# Altium PCB NRF_Transciever.PcbDoc (part 1 of 2)
Units mm, origin at the board's own origin, x right, y up, seen from the top; angles counter-clockwise.
Board outline 46.03 x 45.87 mm, 4 copper layers (Top Layer, Layer 1, Layer 2, Bottom Layer), stack 1.021 mm thick; 129 components, 92 nets, 321 pads, 297 vias.
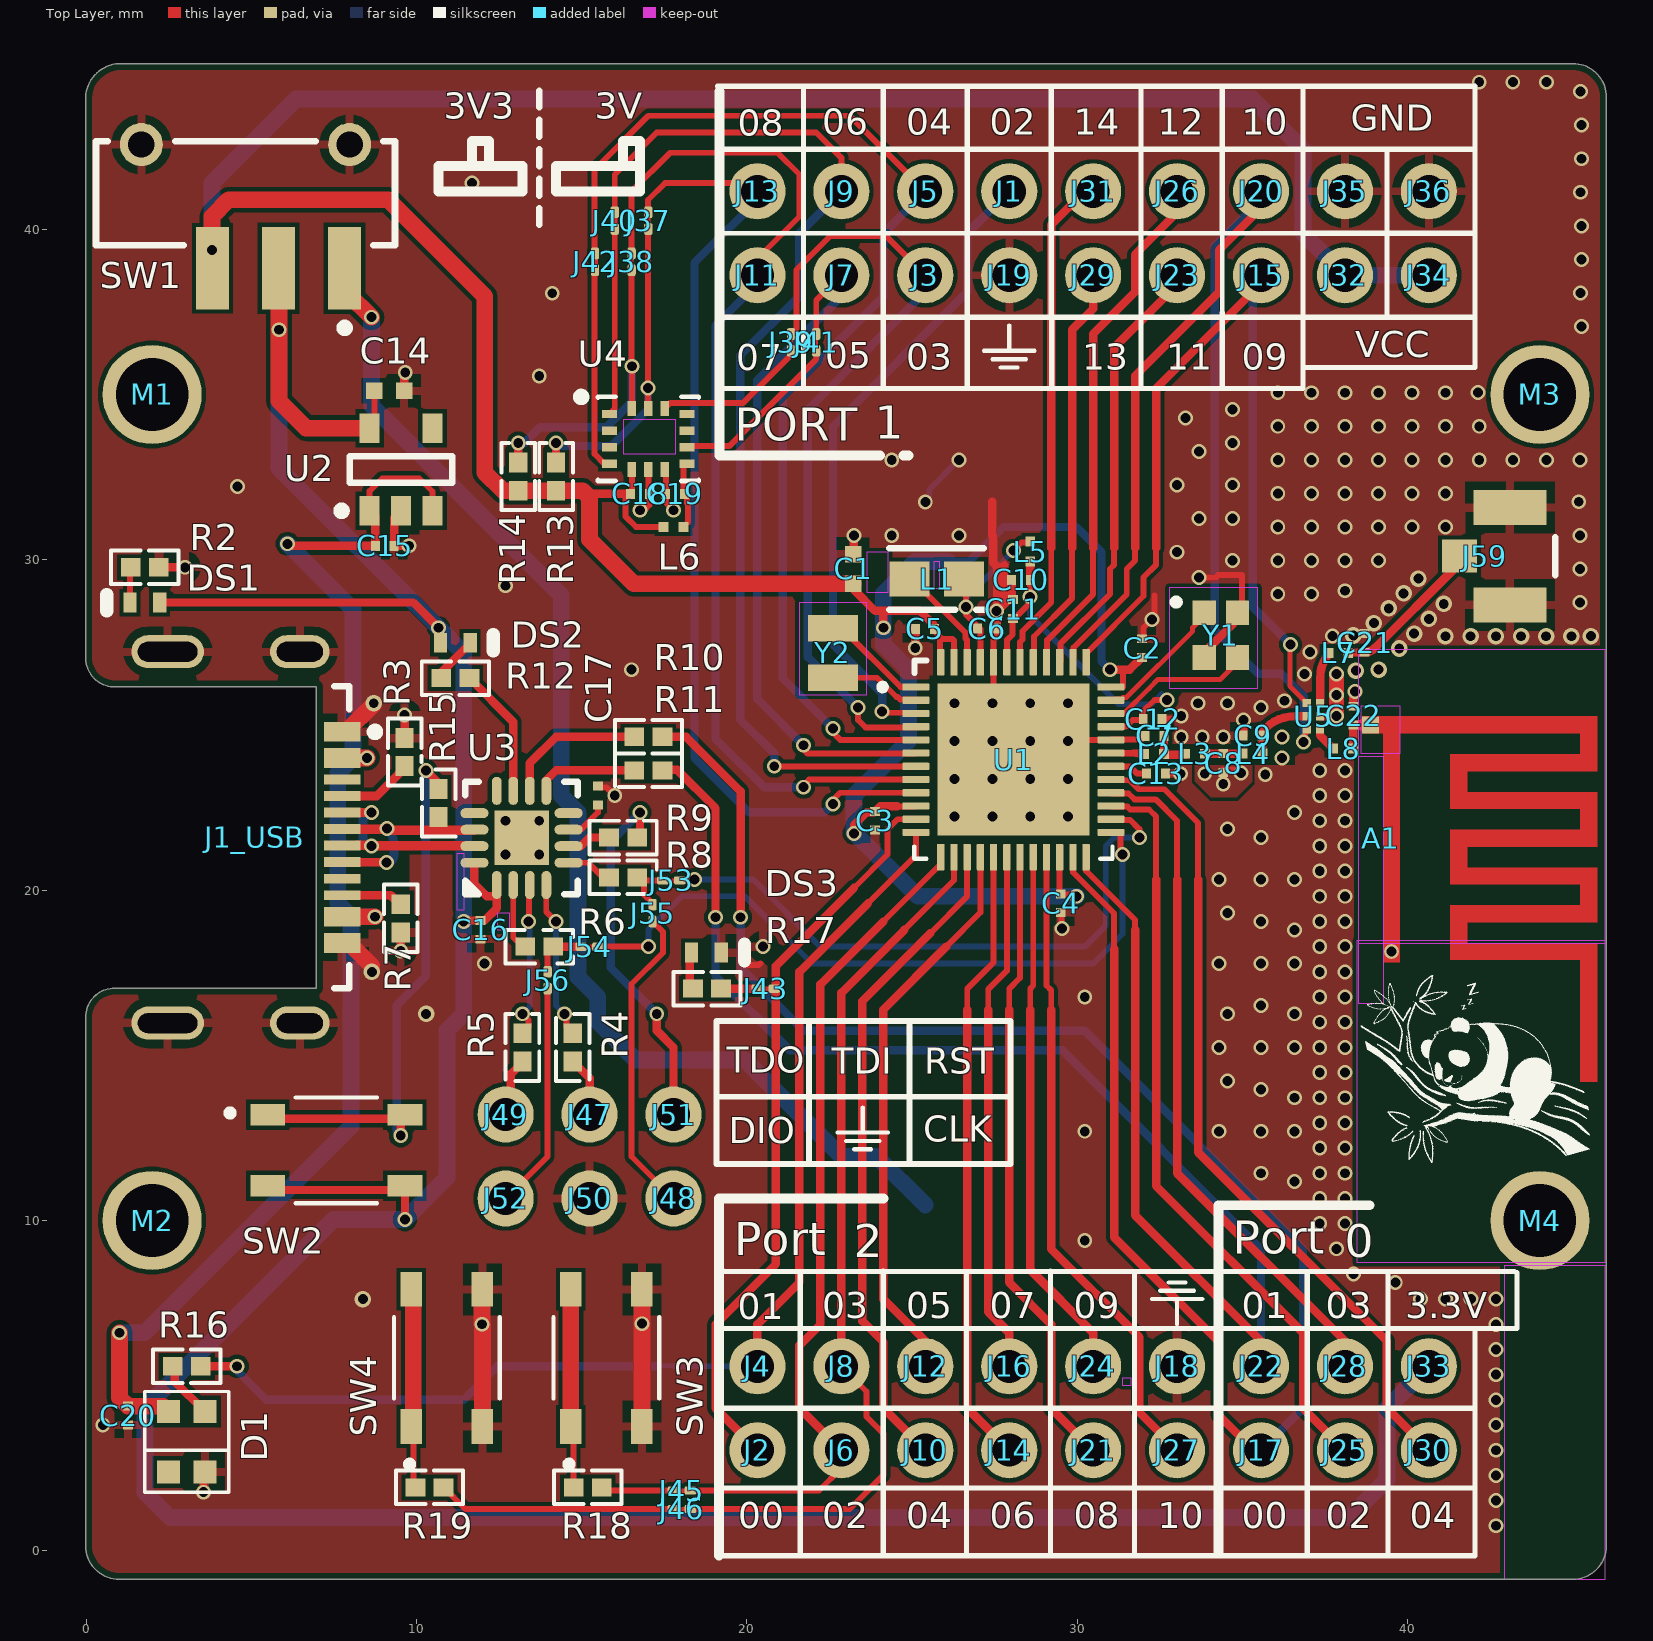
[diagram p0: Top Layer view]
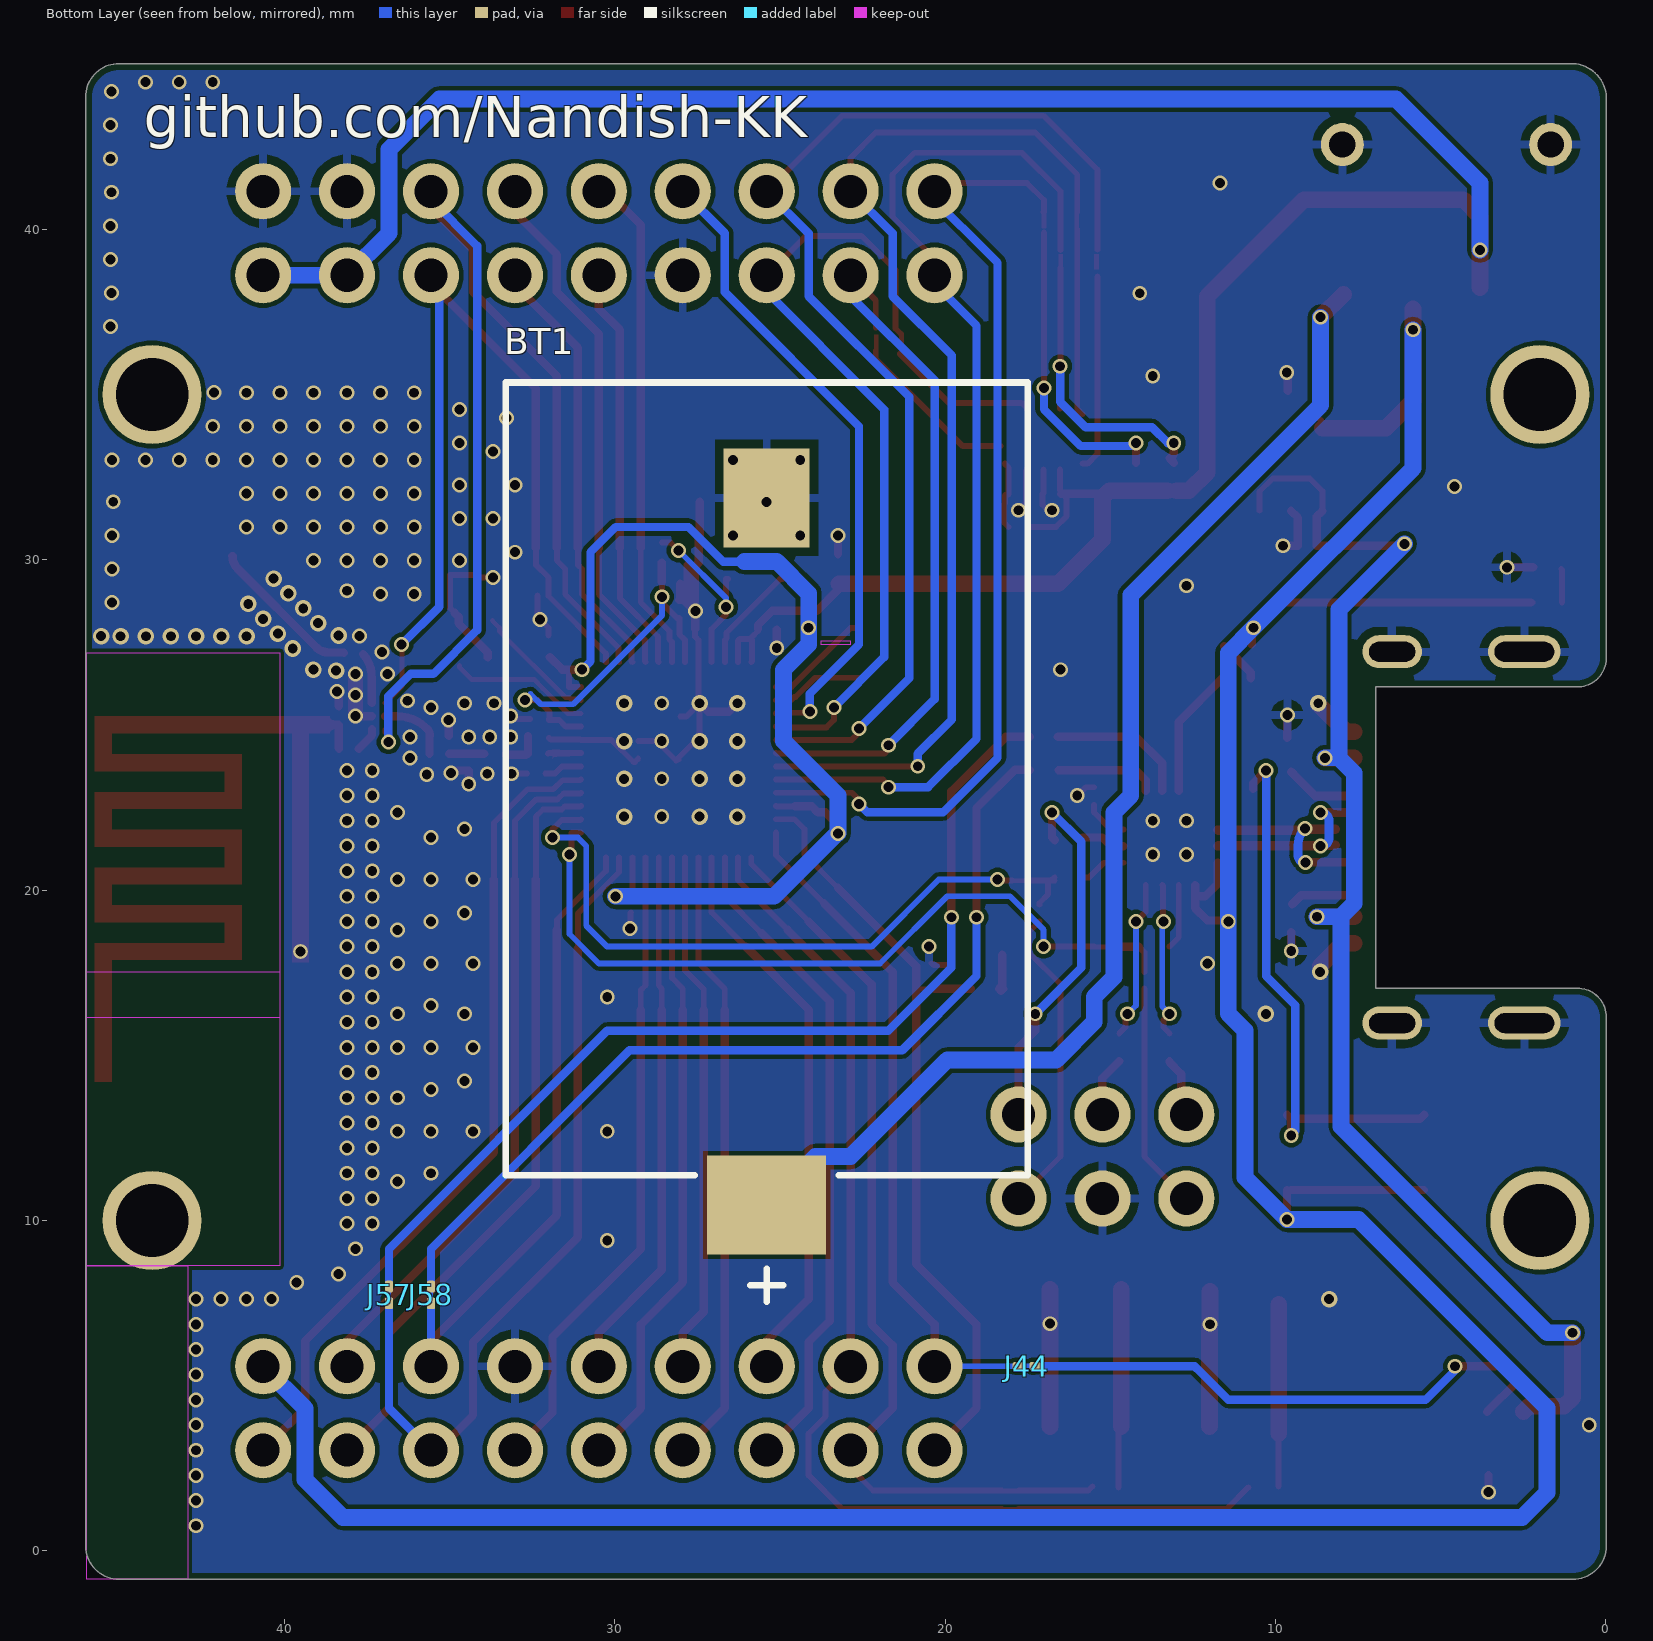
[diagram p1: Bottom Layer view, seen from below]
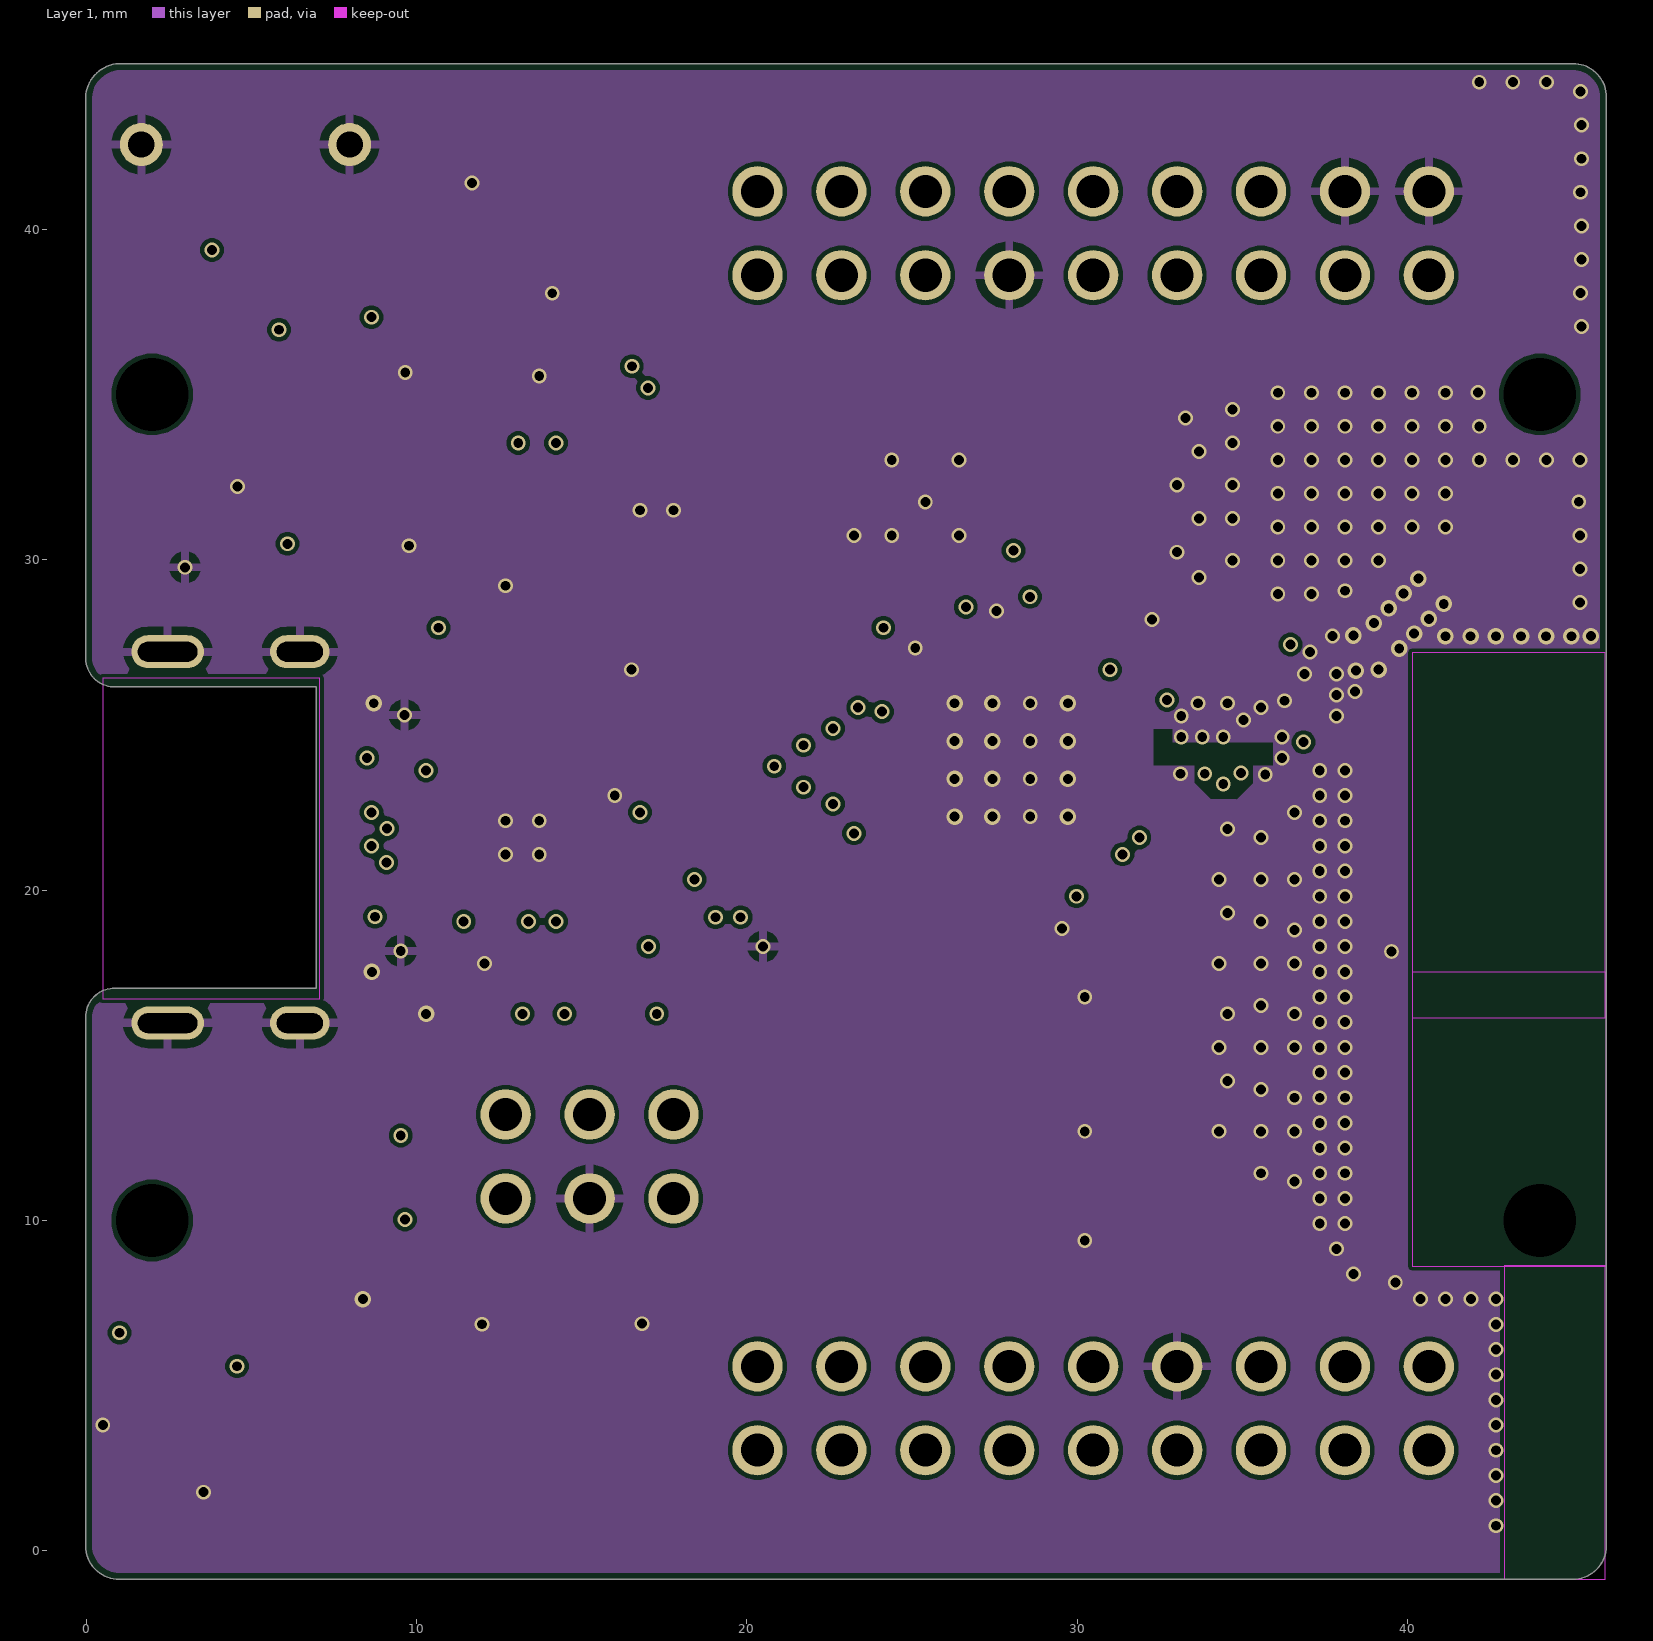
[diagram p2: Layer 1]
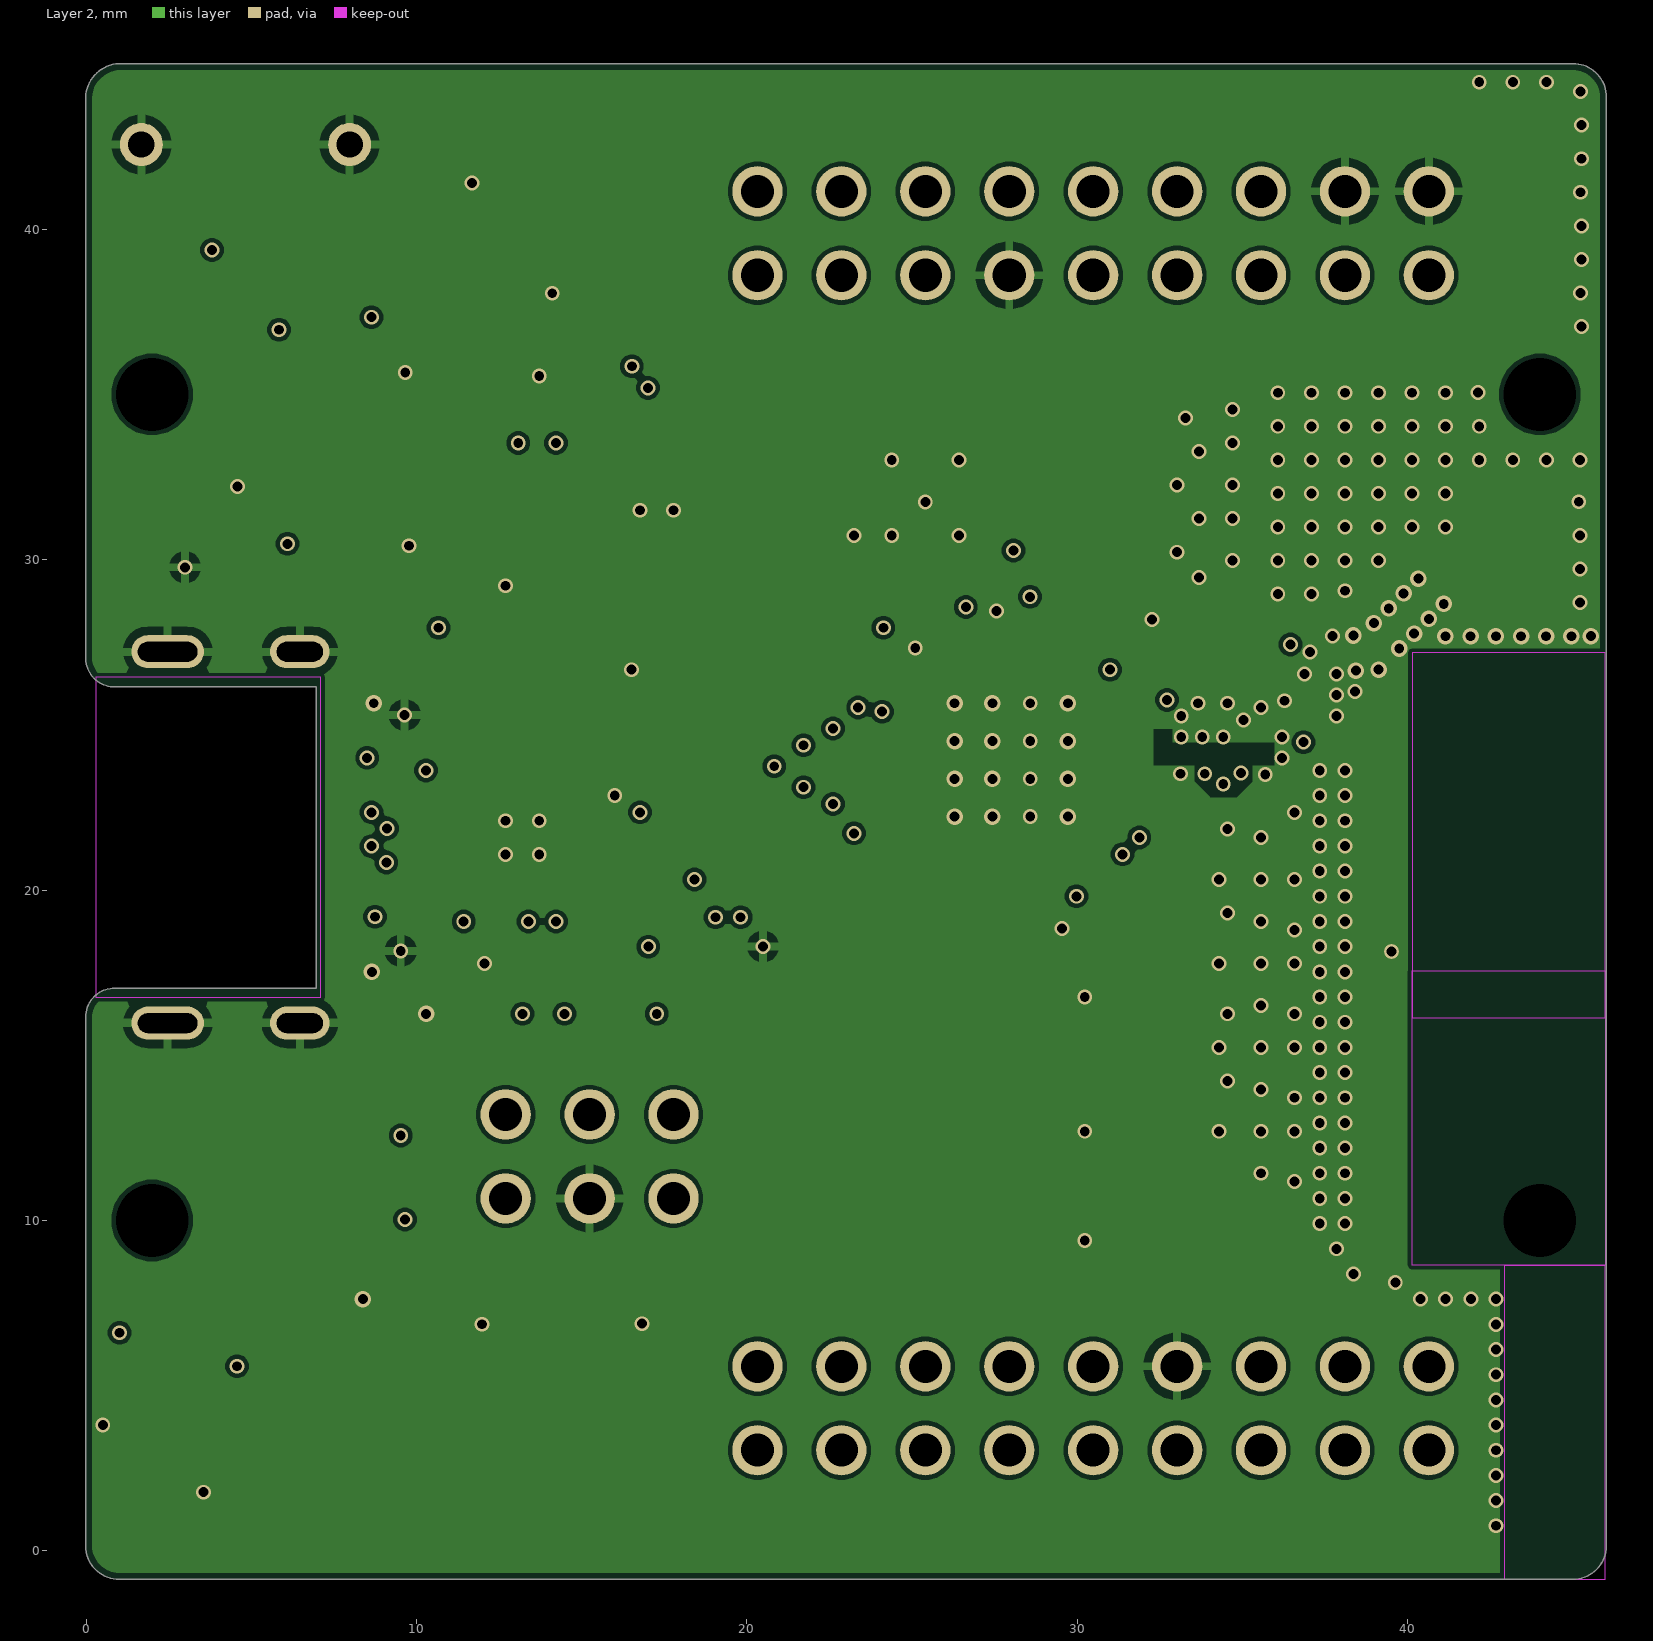
[diagram p3: Layer 2]

## Layer stack, top to bottom
Top Solder: solder mask 0.0102, Solder Resist, Dk 3.5
Top Layer: signal copper 0.0351
Dielectric 2: prepreg 0.2103, PP-022, Dk 4.4
Layer 1: signal copper 0.0152
Dielectric 1: dielectric 0.4999, FR-4, Dk 4.6
Layer 2: signal copper 0.0152
Dielectric 3: prepreg 0.2103, PP-022, Dk 4.4
Bottom Layer: signal copper 0.0351
Bottom Solder: solder mask 0.0102, Solder Resist, Dk 3.5

## Board outline
-0.013,0.141 -0.013,16.151 cw(c0.867,16.151) 0.245,16.773 cw(c0.867,16.151) 0.867,17.031 6.972,17.031 6.972,26.149 0.867,26.149 cw(c0.867,27.029) 0.245,26.407 cw(c0.867,27.029) -0.012,26.996 -0.013,27 -0.013,43.9 cw(c1.05,43.95) 0.999,45.013 1,45.013 45,45.013 cw(c45,44) 46.013,44 46.013,0.156 46.013,0.144 cw(c45,0.156) 45,-0.857 1,-0.857 cw(c1,0.156)

## Design rules (kind name [scope] priority, off if disabled: settings)
BoardOutlineClearance [All] p1: gap=0.2 ignorepadtopadclearanceinfootprint=FALSE
Clearance Clearance_1 [All] p1: gap=0.127 ignorepadtopadclearanceinfootprint=FALSE
Clearance L2_Clearance [InNamedPolygon('GND_L02_P054')] p2: gap=0.254 ignorepadtopadclearanceinfootprint=FALSE
ComponentClearance [All] p1: gap=0.051 collisioncheckmode=3 verticalgap=0.051 showdistances=TRUE checkcomponentboundary=TRUE
DiffPairsRouting USB_Diff_Pair [InDifferentialPair('DAP_USB')] p1: maxlimit=0.203 minlimit=0.203 mostfreqgap=0.203 toplayer_minwidth=0.267 toplayer_maxwidth=0.267 toplayer_prefwidth=0.267 midlayer1_minwidth=0.267 midlayer1_maxwidth=0.267 midlayer1_prefwidth=0.267 midlayer2_minwidth=0.267 midlayer2_maxwidth=0.267 midlayer2_prefwidth=0.267 bottomlayer_minwidth=0.267 bottomlayer_maxwidth=0.267 bottomlayer_prefwidth=0.267 maxuncoupledlength=12.7
Height [All] p1 off: minheight=0 maxheight=25.4 prefheight=12.7
MinimumSolderMaskSliver [All] p1: minsoldermaskwidth=0.1
PolygonConnect [All] p1: connectstyle=Relief reliefconductorwidth=0.254 reliefentries=4 polygonreliefangle="90 Angle" airgapwidth=0.254
RoutingVias RoutingVias_1 [All] p1: holewidth=0.3 width=0.45 viastyle="Through Hole" minholewidth=0.3 minwidth=0.45 maxholewidth=0.8 maxwidth=1.27
SilkToSilkClearance [All] p1: silktosilkclearance=0.1
SilkToSolderMaskClearance [IsPad] p1: minsilkscreentomaskgap=0.15 clearancetoexposedcopper=TRUE
SolderMaskExpansion [All] p1: expansion=0 istentingtop=FALSE soldermaskfromhole=TRUE
SupplyNets "Schematic Supply Nets_3" [InNet('VCC_nRF')] p1: voltage=0.000
SupplyNets "Schematic Supply Nets_2" [InNet('VDD_3V3')] p2: voltage=0.000
SupplyNets "Schematic Supply Nets_1" [InNet('3V')] p3: voltage=0.000
SupplyNets "Schematic Supply Nets" [InNet('GND')] p4: voltage=0.000
Width [All] p1: maxlimit=0.508 minlimit=0.152 preferedwidth=0.254
24 further rules are at their usual default settings.

## Classes and differential pairs
differential pair DAP_USB: +DAP_USB_P -DAP_USB_N

## Components (designator, comment, footprint, x,y, rotation, side; value= is the part's Value field where it differs from the comment)
A1 "2.4GHz MIFA Antenna" "2.4GHZ MIFA" 38.619,25.254 r270 top
BT1 "S8421-45R" FP-S8421-45R-MFG 25.4,23.368 r180 bottom locked
C1 "10uF" 0402_SMD_CAPACITOR 23.216,29.718 r270 top
C2 "100nF" "0201 SMD CAPACITOR" 31.963,27.322 r270 top
C3 "100nF" "0201 SMD CAPACITOR" 23.876,22.098 r90 top
C4 "100nF" "0201 SMD CAPACITOR" 29.499,19.601 r90 top
C5 "100nF" "0201 SMD CAPACITOR" 25.388,27.905 r0 top
C6 "2.2uF" "0201 SMD CAPACITOR" 27.265,27.915 r180 top
C7 "1.5pF" "0201 SMD CAPACITOR" 32.34,24.663 r0 top
C8 "2.0pF" "0201 SMD CAPACITOR" 34.417,23.845 r90 top
C9 "0.3pF" "0201 SMD CAPACITOR" 35.306,24.673 r0 top
C10 "2.2uF" "0201 SMD CAPACITOR" 28.29,29.388 r0 top
C11 "10nF" "0201 SMD CAPACITOR" 28.049,28.506 r270 top
C12 "2.2nF" "0201 SMD CAPACITOR" 32.282,25.176 r180 top
C13 "3.9pF" "0201 SMD CAPACITOR" 32.379,23.523 r180 top
C14 "1uF" 0402_SMD_CAPACITOR 9.178,35.11 r180 top
C15 "100nF" "0201 SMD CAPACITOR" 9.04,30.415 r180 top
C16 "100nF" "0201 SMD CAPACITOR" 11.938,18.796 r90 top
C17 "3.9pF" "0201 SMD CAPACITOR" 15.494,22.86 r270 top
C18 "100nF" "0201 SMD CAPACITOR" 16.764,31.989 r180 top
C19 "100nF" "0201 SMD CAPACITOR" 17.822,31.989 r0 top
C20 "100nF" "0201 SMD CAPACITOR" 1.27,4.095 r90 top
C21 "DNP" "0201 SMD Capacitor" 38.696,27.482 r270 top
C22 "DNP" "0201 SMD Capacitor" 38.354,25.279 r270 top
D1 "WS2812B-2020" WS2812B-2020 3.048,3.302 r270 top
DS1 "16-219A/T2D-AR2T1QY/3T" EVRL-0402-2_V 1.778,28.7 r180 top
DS2 "16-219A/T2D-AR2T1QY/3T" EVRL-0402-2_V 11.176,27.485 r0 top
DS3 "16-219A/T2D-AR2T1QY/3T" EVRL-0402-2_V 18.777,18.11 r0 top
J1 "Single_Header_2.54mm" SINGLE_HEADER_2.54MM 30.48,42.418 r90 top
J1_USB "216990-0002" FP-216990-0002-MFG 3.62,21.594 r270 top
J2 "Single_Header_2.54mm" SINGLE_HEADER_2.54MM 21.59,0.508 r0 top
J3 "Single_Header_2.54mm" SINGLE_HEADER_2.54MM 27.94,39.878 r90 top
J4 "Single_Header_2.54mm" SINGLE_HEADER_2.54MM 21.59,3.048 r0 top
J5 "Single_Header_2.54mm" SINGLE_HEADER_2.54MM 27.94,42.418 r90 top
J6 "Single_Header_2.54mm" SINGLE_HEADER_2.54MM 24.13,0.508 r0 top
J7 "Single_Header_2.54mm" SINGLE_HEADER_2.54MM 25.4,39.878 r90 top
J8 "Single_Header_2.54mm" SINGLE_HEADER_2.54MM 24.13,3.048 r0 top
J9 "Single_Header_2.54mm" SINGLE_HEADER_2.54MM 25.4,42.418 r90 top
J10 "Single_Header_2.54mm" SINGLE_HEADER_2.54MM 26.67,0.508 r0 top
J11 "Single_Header_2.54mm" SINGLE_HEADER_2.54MM 22.86,39.878 r90 top
J12 "Single_Header_2.54mm" SINGLE_HEADER_2.54MM 26.67,3.048 r0 top
J13 "Single_Header_2.54mm" SINGLE_HEADER_2.54MM 21.59,38.608 r0 top
J14 "Single_Header_2.54mm" SINGLE_HEADER_2.54MM 29.21,0.508 r0 top
J15 "Single_Header_2.54mm" SINGLE_HEADER_2.54MM 38.1,39.878 r90 top
J16 "Single_Header_2.54mm" SINGLE_HEADER_2.54MM 29.21,3.048 r0 top
J17 "Single_Header_2.54mm" SINGLE_HEADER_2.54MM 38.1,4.318 r90 top
J18 "Single_Header_2.54mm" SINGLE_HEADER_2.54MM 35.56,6.858 r90 top
J19 "Single_Header_2.54mm" SINGLE_HEADER_2.54MM 29.21,36.068 r0 top
J20 "Single_Header_2.54mm" SINGLE_HEADER_2.54MM 34.29,43.688 r180 top
J21 "Single_Header_2.54mm" SINGLE_HEADER_2.54MM 33.02,4.318 r90 top
J22 "Single_Header_2.54mm" SINGLE_HEADER_2.54MM 36.83,3.048 r0 top
J23 "Single_Header_2.54mm" SINGLE_HEADER_2.54MM 31.75,41.148 r180 top
J24 "Single_Header_2.54mm" SINGLE_HEADER_2.54MM 31.75,3.048 r0 top
J25 "Single_Header_2.54mm" SINGLE_HEADER_2.54MM 40.64,4.318 r90 top
J26 "Single_Header_2.54mm" SINGLE_HEADER_2.54MM 31.75,43.688 r180 top
J27 "Single_Header_2.54mm" SINGLE_HEADER_2.54MM 34.29,0.508 r0 top
J28 "Single_Header_2.54mm" SINGLE_HEADER_2.54MM 40.64,6.858 r90 top
J29 "Single_Header_2.54mm" SINGLE_HEADER_2.54MM 29.21,41.148 r180 top
J30 "Single_Header_2.54mm" SINGLE_HEADER_2.54MM 43.18,4.318 r90 top
J31 "Single_Header_2.54mm" SINGLE_HEADER_2.54MM 31.75,38.608 r0 top
J32 "Single_Header_2.54mm" SINGLE_HEADER_2.54MM 40.64,39.878 r90 top
J33 "Single_Header_2.54mm" SINGLE_HEADER_2.54MM 43.18,6.858 r90 top
J34 "Single_Header_2.54mm" SINGLE_HEADER_2.54MM 43.18,39.878 r90 top
J35 "Single_Header_2.54mm" SINGLE_HEADER_2.54MM 40.64,42.418 r90 top
J36 "Single_Header_2.54mm" SINGLE_HEADER_2.54MM 43.18,42.418 r90 top
J37 "Shorted_Solder_Bridge" SHORTED_SOLDER_BRIDGE 17.018,40.259 r90 top
J38 "Shorted_Solder_Bridge" SHORTED_SOLDER_BRIDGE 16.51,39.014 r90 top
J39 "Shorted_Solder_Bridge" SHORTED_SOLDER_BRIDGE 21.336,36.576 r90 top
J40 "Shorted_Solder_Bridge" SHORTED_SOLDER_BRIDGE 16.002,40.259 r270 top
J41 "Shorted_Solder_Bridge" SHORTED_SOLDER_BRIDGE 22.098,36.576 r90 top
J42 "Shorted_Solder_Bridge" SHORTED_SOLDER_BRIDGE 15.405,39.014 r270 top
J43 "Shorted_Solder_Bridge" SHORTED_SOLDER_BRIDGE 20.574,17.018 r180 top
J44 "Shorted_Solder_Bridge" SHORTED_SOLDER_BRIDGE 17.526,5.588 r180 bottom
J45 "Shorted_Solder_Bridge" SHORTED_SOLDER_BRIDGE 18.034,1.829 r180 top
J46 "Shorted_Solder_Bridge" SHORTED_SOLDER_BRIDGE 18.034,1.27 r180 top
J47 "Single_Header_2.54mm" SINGLE_HEADER_2.54MM 17.78,14.478 r90 top
J48 "Single_Header_2.54mm" SINGLE_HEADER_2.54MM 20.32,11.938 r90 top
J49 "Single_Header_2.54mm" SINGLE_HEADER_2.54MM 15.24,14.478 r90 top
J50 "Single_Header_2.54mm" SINGLE_HEADER_2.54MM 17.78,11.938 r90 top
J51 "Single_Header_2.54mm" SINGLE_HEADER_2.54MM 19.05,10.668 r0 top
J52 "Single_Header_2.54mm" SINGLE_HEADER_2.54MM 15.24,11.938 r90 top
J53 "Shorted_Solder_Bridge" SHORTED_SOLDER_BRIDGE 17.715,20.292 r180 top
J54 "Shorted_Solder_Bridge" SHORTED_SOLDER_BRIDGE 15.24,18.288 r180 top
J55 "Open_Solder_Bridge" OPEN_SOLDER_BRIDGE 17.145,19.304 r90 top
J56 "Open_Solder_Bridge" OPEN_SOLDER_BRIDGE 13.97,17.272 r90 top
J57 "Shorted_Solder_Bridge" SHORTED_SOLDER_BRIDGE 36.83,7.747 r90 bottom
J58 "Shorted_Solder_Bridge" SHORTED_SOLDER_BRIDGE 35.56,7.747 r90 bottom
J59 "U.FL-R-SMT(10)" FP-U_FL-R-SMT_10-MFG 43.093,30.106 r90 top
L1 "4.7uH" FP-MLZ1608-IPC_A 25.745,29.413 r180 top
L2 "2.7nH" 0201_SMD_INDUCTOR 32.325,24.12 r0 top
L3 "3.5nH" 0201_SMD_INDUCTOR 33.561,24.127 r0 top
L4 "3.5nH" 0201_SMD_INDUCTOR 35.306,24.13 r0 top
L5 "FB1" 0201_SMD_INDUCTOR 28.575,30.244 r90 top
L6 "FB1" 0201_SMD_INDUCTOR 17.78,30.988 r180 top
L7 "DNP" 0201_SMD_INDUCTOR 37.897,27.178 r0 top
L8 "DNP" 0201_SMD_INDUCTOR 38.044,24.282 r0 top
M1 "M2_Mounting_Hole" "M2 MOUNTING HOLE" 2,35 r0 top
M2 "M2_Mounting_Hole" "M2 MOUNTING HOLE" 2,10 r0 top
M3 "M2_Mounting_Hole" "M2 MOUNTING HOLE" 44,35 r0 top
M4 "M2_Mounting_Hole" "M2 MOUNTING HOLE" 44,10 r0 top
R2 "1k" RES_0402_GENERIC 1.778,29.769 r180 top
R3 "5.1k" RES_0402_GENERIC 9.643,24.179 r270 top
R4 "100R" RES_0402_GENERIC 14.732,15.24 r270 top
R5 "100R" RES_0402_GENERIC 13.208,15.24 r270 top
R6 "100R" RES_0402_GENERIC 13.716,18.288 r0 top
R7 "5.1k" RES_0402_GENERIC 9.525,19.146 r90 top
R8 "100R" RES_0402_GENERIC 16.256,20.385 r0 top
R9 "100R" RES_0402_GENERIC 16.256,21.59 r0 top
R10 "100R" RES_0402_GENERIC 17.018,24.638 r0 top
R11 "100R" RES_0402_GENERIC 17.018,23.622 r180 top
R12 "1k" RES_0402_GENERIC 11.176,26.416 r180 top
R13 "100k" RES_0402_GENERIC 14.224,32.512 r270 top
R14 "100k" RES_0402_GENERIC 13.081,32.512 r270 top
R15 "10k" RES_0402_GENERIC 10.672,22.636 r90 top
R16 "100R" RES_0402_GENERIC 3.048,5.588 r180 top
R17 "1k" RES_0402_GENERIC 18.796,17.018 r0 top
R18 "10k" RES_0402_GENERIC 15.183,1.923 r0 top
R19 "10k" RES_0402_GENERIC 10.397,1.923 r0 top
SW1 "CSS-1210TB" FP-CSS-1210TB-MFG 4.826,42.164 r180 top
SW2 "SKRPABE010" SW_SKRPABE010 7.577,12.124 r0 top
SW3 "SKRPABE010" SW_SKRPABE010 15.748,5.842 r90 top
SW4 "SKRPABE010" SW_SKRPABE010 10.922,5.842 r90 top
U1 "NRF54L15-QFAA-R Split Symbol" NRF54L15_LQFN_48 27.813,23.945 r0 top
U2 "TCR2EF33" TCR2EF33-SOT-23-5 9.533,32.728 r90 top
U3 "CH552P-QFN16" CH552-QFN16_3X3 13.18,21.578 r90 top
U4 "BMI270_IMU" BMI_270_PQFN50P300X250X70-14L 17.018,33.655 r0 top locked
U5 "BGS12P2L6E6327XTSA1" FP-PG-TSLP-6-MFG 37.146,25.263 r180 top
Y1 "32MHz" OSC_XRCGB32M000F2P01R0 34.343,27.715 r0 top
Y2 "CM8V-T1A-32.768KHZ-9PF-20PPM-TA-QC" XTAL_CM8V-T1A-32.768KHZ-9PF-20PPM-TA-QC 22.606,27.178 r90 top

## Footprints (in the part's own frame and the unit in brackets; to place one, negate y for a bottom-side part, rotate by r counter-clockwise, add the part's x,y. Pads: shape width x height; smd on the part's side, far side on the other; paste and mask are expansions set on the pad)
"2.4GHZ MIFA" [mil] "2.4GHz Meandered Inverted-F Antenna (MIFA) Design from the Cypress appnote AN91445."
  rect 20x20 smd mask+4: 1(10,10)
  round 17.72 hole 11.81: 2(280,35)
  Top Layer region: 293,25 20,25 20,45 293,45
  Top Layer region: 180,105 180,280 200,280 200,105
  Top Layer region: 435,260 285,260 285,280 435,280
  Top Layer region: 135,105 135,280 155,280 155,105
  Top Layer region: 90,105 90,280 110,280 110,105
  Top Layer region: 45,105 45,280 65,280 65,105
  Top Layer region: 0,0 0,280 20,280 20,0
  Top Layer region: 65,260 0,260 0,280 65,280
  Top Layer region: 110,105 45,105 45,125 110,125
  Top Layer region: 225,105 225,280 245,280 245,105
  Top Layer region: 270,105 270,280 290,280 290,105
  Top Layer region: 155,260 90,260 90,280 155,280
  Top Layer region: 200,105 135,105 135,125 200,125
  Top Layer region: 245,260 180,260 180,280 245,280
  Top Layer region: 290,105 225,105 225,125 290,125
"0201 SMD CAPACITOR" [mm] "GMK063BJ104KP"
  rect 0.27x0.3 smd mask+0.05: 1(-0.285,0) 2(0.285,0)
  body extent -0.32,-0.17 0.32,0.17, height 0.3
"0201 SMD Capacitor" [mm] "GMK063BJ104KP"
  rect 0.27x0.3 smd mask+0.05: 1(-0.285,0) 2(0.285,0)
  body extent -0.32,-0.17 0.32,0.17, height 0.3
0201_SMD_INDUCTOR [mm]
  rect 0.3x0.3 smd: 1(-0.3,0) 2(0.3,0)
  body extent -0.3,-0.15 0.3,0.15, height 0.3
0402_SMD_CAPACITOR [mm]
  rect 0.5x0.5 smd: 1(-0.45,0) 2(0.45,0)
  body extent -0.41,-0.23 0.38,0.23, height 0.25
BMI_270_PQFN50P300X250X70-14L [mm] "PQFN, 14-Leads, Body 3.00x2.50mm, Pitch 0.50mm, IPC High Density"
  rect 0.45x0.25 smd: 1(-1.175,0.75) 2(-1.175,0.25) 3(-1.175,-0.25) 4(-1.175,-0.75) 8(1.175,-0.75) 9(1.175,-0.25) 10(1.175,0.25) 11(1.175,0.75)
  rect 0.25x0.45 smd: 5(-0.5,-0.925) 6(0,-0.925) 7(0.5,-0.925) 12(0.5,0.925) 13(0,0.925) 14(-0.5,0.925)
  silkscreen extent -2.16,-1.28 1.53,1.39, body extent -1.53,-1.28 1.53,1.28, height 0.7
CH552-QFN16_3X3 [mm] "QFN, 16-Leads, Body 3.00x3.00mm, Pitch 0.50mm, Thermal Pad 1.65x1.65mm, IPC Medium Density"
  oval 0.85x0.3 smd: 1(-1.425,0.75) 2(-1.425,0.25) 3(-1.425,-0.25) 4(-1.425,-0.75) 9(1.425,-0.75) 10(1.425,-0.25) 11(1.425,0.25) 12(1.425,0.75)
  oval 0.3x0.85 smd: 5(-0.75,-1.425) 6(-0.25,-1.425) 7(0.25,-1.425) 8(0.75,-1.425) 13(0.75,1.425) 14(0.25,1.425) 15(-0.25,1.425) 16(-0.75,1.425)
  rect 1.65x1.65 smd: 17(0,0)
  silkscreen extent -1.7,-1.7 1.7,1.7, body extent -1.58,-1.58 1.58,1.58, height 0.8
EVRL-0402-2_V [mm] "SMD, 2-Leads, Body 1x0.5mm"
  rect 0.4x0.6 smd: 1(-0.45,0) 2(0.45,0)
  silkscreen extent 1.15,-0.25 1.15,0.25, body extent -0.5,-0.25 0.5,0.25, height 0.25
FP-216990-0002-MFG [mm]
  rrect100% 1x1.8 hole 1.4 slot 0.6 at 0 deg paste-2539.97 mask+0: 1(-5.62,2.85) 2(5.62,2.85)
  rrect100% 1x2.2 hole 1.8 slot 0.6 at 0 deg paste-2539.97 mask+0: 3(-5.62,-1.15) 4(5.62,-1.15)
  rect 0.6x1.1 smd paste+0 mask+0: A1-B12(-3.2,4.13) A4-B9(-2.4,4.13) B1-A12(3.2,4.13) B4-A9(2.4,4.13)
  rect 0.3x1.1 smd paste+0 mask+0: A5(-1.25,4.13) A6(-0.25,4.13) A7(0.25,4.13) A8(1.25,4.13) B5(1.75,4.13) B6(0.75,4.13) B7(-0.75,4.13) B8(-1.75,4.13)
  silkscreen extent -4.57,3.9 4.57,5.25, body extent -6.22,-3.45 6.22,4.65, height 0.25
FP-CSS-1210TB-MFG [mm]
  rect 1x2.5 smd paste+0 mask+0: 1(-3,3.35) 2(-1,3.35) 3(1,3.35)
  round 1.3 hole 0.8 paste-2539.97 mask+0: 4(-3.15,-0.4) 5(3.15,-0.4)
  silkscreen extent -4.52,-0.5 4.52,5.27, body extent -4.62,-2.75 4.62,4.7, height 0.25
FP-MLZ1608-IPC_A [mm]
  rect 1.206x1.058 smd paste+0 mask+0: 1(-0.826,0) 2(0.826,0)
  silkscreen extent -1.43,-0.93 1.43,0.93, body extent -1.93,-1.03 1.93,1.03, height 0.25
FP-PG-TSLP-6-MFG [mm]
  rect 0.25x0.25 smd paste-1000 mask+0: 1(-0.2,0.4) 2(-0.2,0) 3(-0.2,-0.4) 4(0.2,-0.4) 5(0.2,0) 6(0.2,0.4)
  body extent -0.48,-0.67 0.48,0.67, height 0.25
FP-S8421-45R-MFG [mm]
  rect 2.6x3 smd paste+0 mask+0: 1(0,8.5)
  rect 3.6x3 smd paste+0 mask+0: 2(0,-12.9)
  silkscreen extent -7.9,-15.83 7.9,12, body extent -7.8,-14 7.8,11.28, height 5.5
FP-U_FL-R-SMT_10-MFG [mm]
  rect 1x1.05 smd paste-1000 mask+0: 1(0,1.525)
  rect 1.05x2.2 smd paste-1000 mask+0: 2(-1.475,0) 3(1.475,0)
  silkscreen extent -0.58,-1.38 0.58,-1.38, body extent -2.1,-1.48 2.1,2.15, height 0.25
"M2 MOUNTING HOLE" [mm] "M2 Mounting hole ( 2.2 dia)"
  round 3 / inner round 0 / far side round 3 hole 2.2 mask-2539.97: ""(0,0)
NRF54L15_LQFN_48 [mm]
  rrect25% 0.81x0.22 smd: 1(-2.696,2.2) 2(-2.696,1.8) 3(-2.696,1.4) 4(-2.696,1) 5(-2.696,0.6) 6(-2.696,0.2) 7(-2.696,-0.2) 8(-2.696,-0.6) 9(-2.696,-1) 10(-2.696,-1.4) 11(-2.696,-1.8) 12(-2.696,-2.2) 25(3.204,-2.2) 26(3.204,-1.8) 27(3.204,-1.4) 28(3.204,-1) 29(3.204,-0.6) 30(3.204,-0.2) 31(3.204,0.2) 32(3.204,0.6) 33(3.204,1) 34(3.204,1.4) 35(3.204,1.8) 36(3.204,2.2)
  rrect25% 0.22x0.81 smd: 13(-1.946,-2.95) 14(-1.546,-2.95) 15(-1.146,-2.95) 16(-0.746,-2.95) 17(-0.346,-2.95) 18(0.054,-2.95) 19(0.454,-2.95) 20(0.854,-2.95) 21(1.254,-2.95) 22(1.654,-2.95) 23(2.054,-2.95) 24(2.454,-2.95) 37(2.454,2.95) 38(2.054,2.95) 39(1.654,2.95) 40(1.254,2.95) 41(0.854,2.95) 42(0.454,2.95) 43(0.054,2.95) 44(-0.346,2.95) 45(-0.746,2.95) 46(-1.146,2.95) 47(-1.546,2.95) 48(-1.946,2.95)
  rect 4.6x4.6 smd paste-3: 49(0.254,0)
  silkscreen extent -3.81,-3 3.25,3, body extent -2.75,-3 3.25,3, height 0.85
OPEN_SOLDER_BRIDGE [mil] "Solder Bridge"
  rrect50% 14x10 smd mask+2: 1(-10,0) 2(10,0)
OSC_XRCGB32M000F2P01R0 [mm]
  rect 0.7x0.75 smd: 1(-0.5,0.675) 2(-0.5,-0.675) 3(0.5,-0.675) 4(0.5,0.675)
  silkscreen extent -1.45,0.9 -1.25,1.1, body extent -0.8,-1 0.8,1, height 0.7
RES_0402_GENERIC [mm]
  rect 0.6x0.55 smd: 1(-0.425,0) 2(0.425,0)
  silkscreen extent -1.02,-0.51 1.02,0.51, body extent -0.53,-0.28 0.53,0.28, height 0.3
SHORTED_SOLDER_BRIDGE [mil] "Solder Bridge"
  rrect50% 14x10 smd mask+2: 1(-10,0) 2(10,0)
  Top Layer region: -9,3.02 9,3.02 9,-2.01 -9,-2.01 -9,0
SINGLE_HEADER_2.54MM [mm]
  round 1.7 / inner round 1.524 / far side round 1.7 hole 1 mask-2539.97: 1(-1.27,2.54)
  body extent -2.54,1.27 0,3.81, height 8.38
SW_SKRPABE010 [mm]
  rect 1.05x0.65 smd: 1(-2.075,1.075) 2(2.075,1.075) 3(-2.075,-1.075) 4(2.075,-1.075)
  silkscreen extent -3.32,-1.6 1.23,1.6, body extent -2.3,-1.6 2.3,1.6, height 2.5
TCR2EF33-SOT-23-5 [mm] "SOT23, 5-Leads, Body 2.90x2.45mm, Pitch 0.95mm, IPC Medium Density"
  rect 0.9x0.6 smd: 1(-1.25,0.95) 2(-1.25,0) 3(-1.25,-0.95) 4(1.25,-0.95) 5(1.25,0.95)
  silkscreen extent -1.37,-1.55 0.4,1.92, body extent -1.29,-1.55 1.29,1.55, height 1.3
WS2812B-2020 [mm] "WS2812b-2020 RGB LED with built-in driver"
  rect 0.7x0.7 smd: 1(0.915,-0.55) 2(0.915,0.55) 3(-0.915,0.55) 4(-0.915,-0.55)
  silkscreen extent -1.52,-1.27 1.52,1.27, body extent -1.12,-1.02 1.12,1.02, height 0.56
XTAL_CM8V-T1A-32.768KHZ-9PF-20PPM-TA-QC [mm]
  rect 0.8x1.5 smd: 1(-0.75,0) 2(0.75,0)
  body extent -1,-0.6 1,0.6, height 0.6

## Part data
A1: library part "2.4GHz MIFA", "2.4GHz Meandered Inverted F Antenna from Cypress appnote AN91445"
BT1: library part CMP-2000-07028-3, "BATTERY HOLDER COIN 20MM SMD", Case/Package=SMD/SMT, Max Operating Temperature=105°C, Min Operating Temperature=-40°C, Package Quantity=500, Contact Plating=Bronze, Material=Polyphenylene, Mount="Surface Mount", Number of Batteries=1, Number of Cells=1, Packaging="Tape and Reel", REACH SVHC="No SVHC", Termination=SMD/SMT
C1 C14: library part CAP_0402, "Capacitor SMD 0402 Generic"
C2 C3 C4 C5 C6 C7 C8 C9 C10 C11 C12 C13 C15 C16 C17 C18 C19 C20 C21 C22: library part CAP_0201, "Capacitor SMD 0201 Generic"
D1: "RGB LED (Built-in IC) 2x2mm SMD"
DS1 DS2 DS3: library part CMP-007-00000-2, "Chip LED, White, 5 V, 10 mA, 30 mW, -40 to 85 degC, 2-Pin SMD (0402), RoHS, Tape and Reel", Case/Package=0402, Forward Current=5mA, Forward Voltage=2.6V, Illumination Colour=White, Manufacturer="Everlight Electronics", Max Operating Temperature=85°C, Min Operating Temperature=-40°C, Package Description="2-Pin Surface Mount Device, Body 1 x 0.5 mm", Package Quantity=3000, Power=30mW, Datasheet URL=http://www.everlight.com/file/ProductFile/16-219A-T2D-AR2T1QY-3T.pdf, Datasheet Version="Rev. 5, 04/2013", Luminous Intensity=360mcd, Manufacturer URL=http://www.everlight.com/, Mounting Technology=SM, Package Reference=0402, Packaging=TapeandReel, RoHS Compliant=True, Viewing Angle=130degrees
J1_USB: library part CMP-04767-000018-1, "CONN RCP USB2.0 TYP C 24P SMD RA"
J59: library part CMP-0029-00003-2, "CONN U.FL RCPT STR 50 OHM SMD", Case/Package=SMD/SMT, Dielectric Material=Polymer, Frequency=6GHz, Housing Color=Beige, Max Operating Temperature=90°C, Min Operating Temperature=-40°C, Package Quantity=1, Body Material=Bronze, Body Plating=Silver, Connector Type=Coaxial, Contact Material=Brass, Contact Plating=Gold, Depth=3.1mm, Fastening Type=Snap, Impedance=50R, Lead Free="Lead Free", Length=3mm, Max Frequency=6GHz, Mount="Surface Mount", Orientation=Vertical, Packaging="Tape and Reel", Plating=Silver, Radiation Hardening=No, Termination=Solder
L1: library part CMP-08253-000311-1, "Shielded Multilayer Inductor 4.7uH ±20% 350mA 650mΩ SMD 0603", Case Code (Imperial)=0603, Case Code (Metric)=1608, Current Rating=350mA, DC Resistance (DCR)=650mR, Max Operating Temperature=125°C, Min Operating Temperature=-55°C, Package Quantity=4000, Saturation Current=120mA, Self Resonant Frequency=80MHz, Test Frequency=2MHz, Tolerance=20%, Case/Package=0603, Core Material=Ferrite, Height - Seated (Max)=0.037inch, Inductance=4.7uH, Length=0.063inch, Mount="Surface Mount", Packaging="Tape and Reel", RoHS Compliant=Yes, Shielding=Shielded, Width=0.031inch
L2 L3 L4 L5 L6 L7 L8: library part INDUCTOR_0201, "Inductor SMD 0201 Generic"
M1 M2 M3 M4: "M2 Screw mounting hole. / Actual dia. 2.2 mm"
R2 R3 R4 R5 R6 R7 R8 R9 R10 R11 R12 R13 R14 R15 R16 R17 R18 R19: library part RES_0402, "Resistor SMD 0402 Generic"
SW1: library part CMP-71745-000010-1, "SWITCH SLIDE SPDT 100MA 12V", Case/Package=SMD/SMT, Contact Current Rating=100mA, Max Operating Temperature=70°C, Max Voltage Rating (DC)=12V, Min Operating Temperature=-20°C, Operating Force=357gf, Actuator Length=2mm, Actuator Material=Polymer, Actuator Type=Standard, Contact Material="Copper Alloy", Contact Plating=Gold, Contact Style=Non-Shorting, Current Rating=100mA, Electrical Life=10000Cycles, Mount="Surface Mount", Number of Poles=1, Number of Positions=2, Orientation="Right Angle", Packaging="Tape and Reel", Radiation Hardening=No, RoHS Compliant=Yes, Series=CSS, Switch Function=On-On, Switch Travel=2mm, Termination="Gull Wing", Throw Configuration=SPDT, Voltage Rating (DC)=12V
SW2 SW3 SW4: library part CMP-015-000000-1, "Switch Tactile N.O. SPST Button J-Bend 0.05A 16VDC 1.57N SMD Automotive T/R", Package=None, Check_prices=https://www.snapeda.com/parts/SKRPABE010/ALPS/view-part/?ref=eda, Component Type=Standard, Design Item ID=SKRPABE010, MF=ALPS, MP=SKRPABE010, Pin Count=4, SnapEDA_Link=https://www.snapeda.com/parts/SKRPABE010/ALPS/view-part/?ref=snap, Source=SKRPABE010.SchLib
U1: library part NRF54L15-QFAA-R, Package=None, Availability=Unavailable, Component Type=Standard, Design Item ID=NRF54L15-QFAA-R, MF="{'manufacturer': u'Nordic Semiconductor ASA'}", MP=NRF54L15-QFAA-R, Pin Count=49, Price=None, Source=NRF54L15-QFAA-R.SchLib
U4: "6-axis IMU"
U5: library part CMP-32859-000004-1, "CMOS SWITCH"
Y1: library part CMP-005-000000-1, "32MHz Â±20ppm Crystal 8pF 100 Ohms 4-SMD, No Lead", Package="SMD-4 Murata", Availability="In Stock", Check_prices=https://www.snapeda.com/parts/XRCGB32M000F2P01R0/Murata%20Electronics%20North%20America/view-part/3227036/?ref=eda, Component Type=Standard, Design Item ID=XRCGB32M000F2P01R0, MF="Murata Electronics", MP=XRCGB32M000F2P01R0, Pin Count=2, Price=None, SnapEDA_Link=https://www.snapeda.com/parts/XRCGB32M000F2P01R0/Murata%20Electronics%20North%20America/view-part/3227036/?ref=snap, Source=XRCGB32M000F2P01R0.SchLib
Y2: library part CMP-007-000000-1, "Tuning Fork Crystal 32.768kHz in 1.2 x 2.0mm package", Package="SMD-2 Micro Crystal", Check_prices=https://www.snapeda.com/parts/CM8V-T1A-32.768KHZ-9PF-20PPM-TA-QC/Micro+Crystal/view-part/?ref=eda, Component Type=Standard, Design Item ID=CM8V-T1A-32.768KHZ-9PF-20PPM-TA-QC, MF="Micro Crystal", MP=CM8V-T1A-32.768KHZ-9PF-20PPM-TA-QC, Pin Count=2, SnapEDA_Link=https://www.snapeda.com/parts/CM8V-T1A-32.768KHZ-9PF-20PPM-TA-QC/Micro+Crystal/view-part/?ref=snap, Source=CM8V-T1A-32.768KHZ-9PF-20PPM-TA-QC.SchLib

## Via types
v1: diameter 0.45, hole 0.3, Top Layer to Bottom Layer, 263 vias
v2: diameter 0.5, hole 0.3, Top Layer to Bottom Layer, 34 vias

## Nets (pads, with @x,y where several pads share a name; then routed paths per layer and width w, separated by ;. In a path a pad name is that pad's centre, name@x,y a point inside that pad or via, vN(x,y) a via of type N, cw(c..) or ccw(c..) an arc to the next point about the centre after c; other vN are vias at no path point)
3V: BT1.2 SW1.1 | length 37.3
  Top Layer w0.508: SW1.1@7.947,38.027 v1(8.636,37.338)
  Bottom Layer w0.508: v1(8.636,37.338) 8.636,34.671 14.38,28.927 14.38,22.863 14.888,22.355 14.888,17.37 15.488,16.77 15.488,16.008 16.637,14.859 19.939,14.859 22.86,11.938 23.93,11.938 BT1.2@25.4,10.468
+5V: C15.2 C20.2 D1.4 J1_USB.A4-B9 J1_USB.B4-A9 U2.1 U2.3 | length 42.4
  Top Layer w0.178: U2.1@8.583,31.478 8.583,32.078 8.964,32.459 10.086,32.459 10.483,32.062 U2.3@10.483,31.478
  Top Layer w0.254: v1(6.096,30.48) 6.161,30.415 C15.2@8.755,30.415 8.755,31.306 U2.1@8.583,31.478
  Top Layer w0.508: v1(1.016,6.604) 1.016,4.634 C20.2@1.27,4.38 2.335,4.38 D1.4@2.498,4.217 ; J1_USB.B4-A9@7.62,19.194 v1(8.746,19.194) ; J1_USB.A4-B9@7.62,23.994 8.5,23.994 v1(8.509,24.003)
  Bottom Layer w0.508: v1(1.016,6.604) 1.778,6.604 8.018,12.844 8.018,18.624 8.018,19.194 ; v1(6.096,30.48) 8.078,28.498 8.078,24.003 ; v1(8.509,24.003) 8.078,24.003 ; v1(8.746,19.194) 8.018,19.194 ; 8.018,19.194 7.62,19.592 7.62,23.545 8.078,24.003
ANT: L2.1 U1.31 | length 1
  Top Layer w0.178: U1.31@31.017,24.145 32.006,24.145 L2.1@32.025,24.127
CLK: J53.2 J55.2 R8.2 | length 3.2
  Top Layer w0.178: R8.2@16.681,20.292 J53.2@17.461,20.292 ; R8.2@16.681,20.385 16.764,20.302 16.789,20.302 16.892,20.199 16.892,19.862 17.145,19.609 J55.2@17.145,19.558 ; J53.2@17.461,20.292 16.789,20.292 J53.2@17.461,20.292
DAP_USB_N: J1_USB.A7 J1_USB.B7 U3.15 | length 6
  Top Layer w0.267: J1_USB.B7@7.62,22.344 8.636,22.344 v1(8.636,22.352) ; U3.15@11.74,21.343 U3.15@11.755,21.328
  Top Layer w0.286: J1_USB.A7@8.187,21.351 8.614,21.351 8.639,21.327 v1(8.641,21.329) 8.641,21.343 U3.15@11.74,21.343
  Bottom Layer w0.267: v1(8.636,22.352) ccw(c8.636,22.097) 8.381,22.097 8.381,21.584 ccw(c8.641,21.584) 8.641,21.324 v1(8.641,21.329)
DAP_USB_P: J1_USB.A6 J1_USB.B6 R15.1 U3.14 | length 6.3
  Top Layer w0.267: J1_USB.B6@7.62,20.844 8.443,20.844 ; 8.443,20.844 8.84,20.844 ; 8.84,20.844 9.077,20.844 v1(9.09,20.832) ; U3.14@11.74,21.813 U3.14@11.755,21.828
  Top Layer w0.286: J1_USB.A6@8.187,21.84 9.085,21.84 v1(9.107,21.862) ; v1@9.107,21.813 U3.14@11.74,21.813
  Bottom Layer w0.267: v1(9.09,20.832) ccw(c9.09,21.066) 9.324,21.066 9.324,21.343 ccw(c8.592,21.343) 9.11,21.86 v1(9.107,21.862)
DCC: L1.2 U1.46 | length 3.3
  Top Layer w0.178: L1.2@24.919,29.413 24.993,29.413 26.611,27.795 26.611,27.623 26.667,27.567 U1.46@26.667,26.895
DEBUG_RX: R10.1 U3.10 | length 4.3
  Top Layer w0.254: U3.10@13.43,23.003 13.43,23.844 14.224,24.638 R10.1@16.593,24.638
DEBUG_TX: R11.2 U3.9 | length 3.1
  Top Layer w0.254: U3.9@13.93,23.003 13.93,23.328 14.224,23.622 R11.2@16.568,23.622
DECA: C10.2 C11.2 C12.2 L5.1 U1.33 U1.43 | length 11.5
  Top Layer w0.178: U1.43@27.867,26.895 27.867,27.562 28.036,27.732 C11.2@28.036,28.227 ; C11.2@28.049,28.231 28.109,28.231 28.575,28.696 28.575,28.87 28.565,28.88 C10.2@28.565,29.275 ; U1.33@31.017,24.945 31.478,24.945 31.678,25.146 31.983,25.146 31.983,25.174 31.973,25.184 31.973,25.395 32.334,25.756 v1(32.715,25.756)
  Top Layer w0.254: C10.2@28.581,29.312 L5.1@28.581,29.916
  Bottom Layer w0.178: v1(28.569,28.876) 28.565,28.872 28.565,28.319 31.259,25.625 32.242,25.625 32.547,25.93 32.715,25.762 v1(32.715,25.756)
DECD: C6.2 L1.1 L5.2 U1.45 | length 5.7
  Top Layer w0.178: L1.1@26.571,29.413 26.627,29.413 v1(26.627,28.567) 26.627,28.343 27.067,27.903 U1.45@27.067,26.895 ; v1(28.067,30.277) 28.311,30.521 L5.2@28.575,30.521
  Bottom Layer w0.178: v1(26.627,28.567) 26.627,28.836 v1(28.067,30.277)
DIO: J54.2 J56.2 R6.2 | length 1.7
  Top Layer w0.178: J56.2@13.97,17.526 13.97,18.117 R6.2@14.141,18.288
  Top Layer w0.254: R6.2@14.141,18.288 J54.2@14.986,18.288